# EAGLE board 5x5 (EAGLE 9.0.1), part 1 of 2
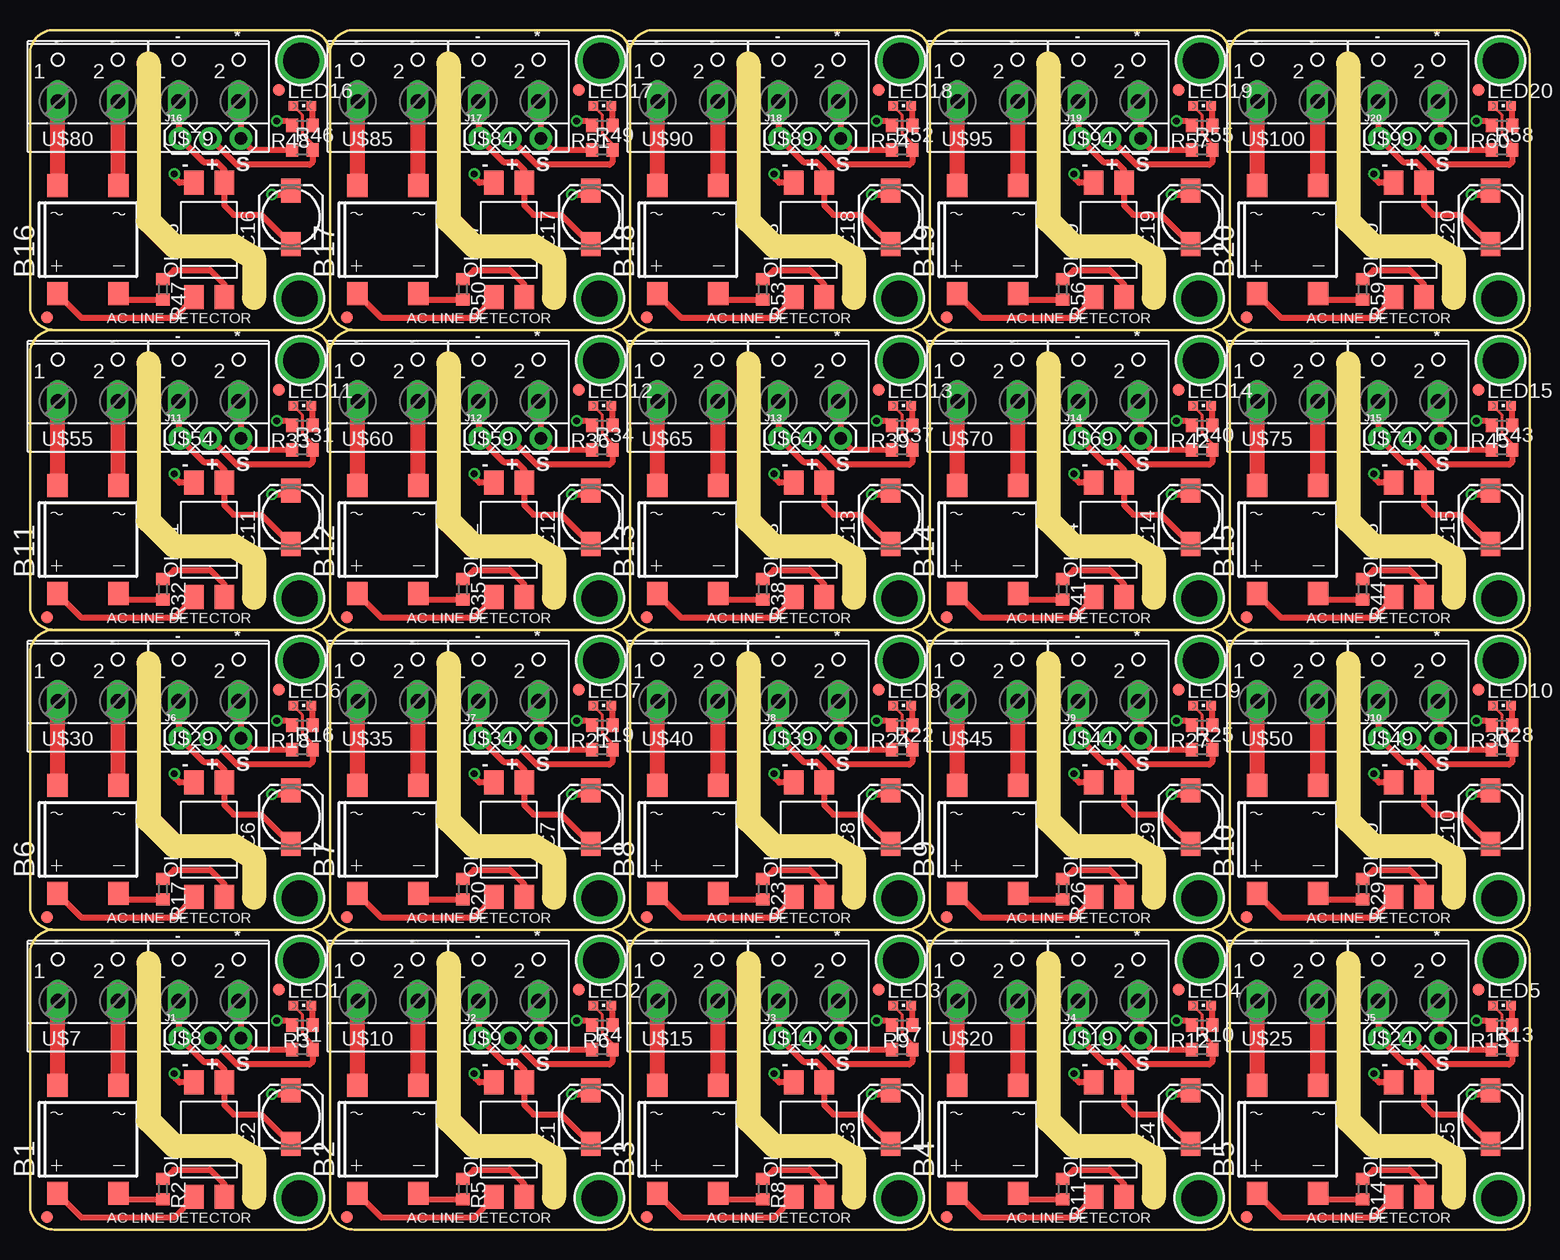
[diagram p0: board, top side]
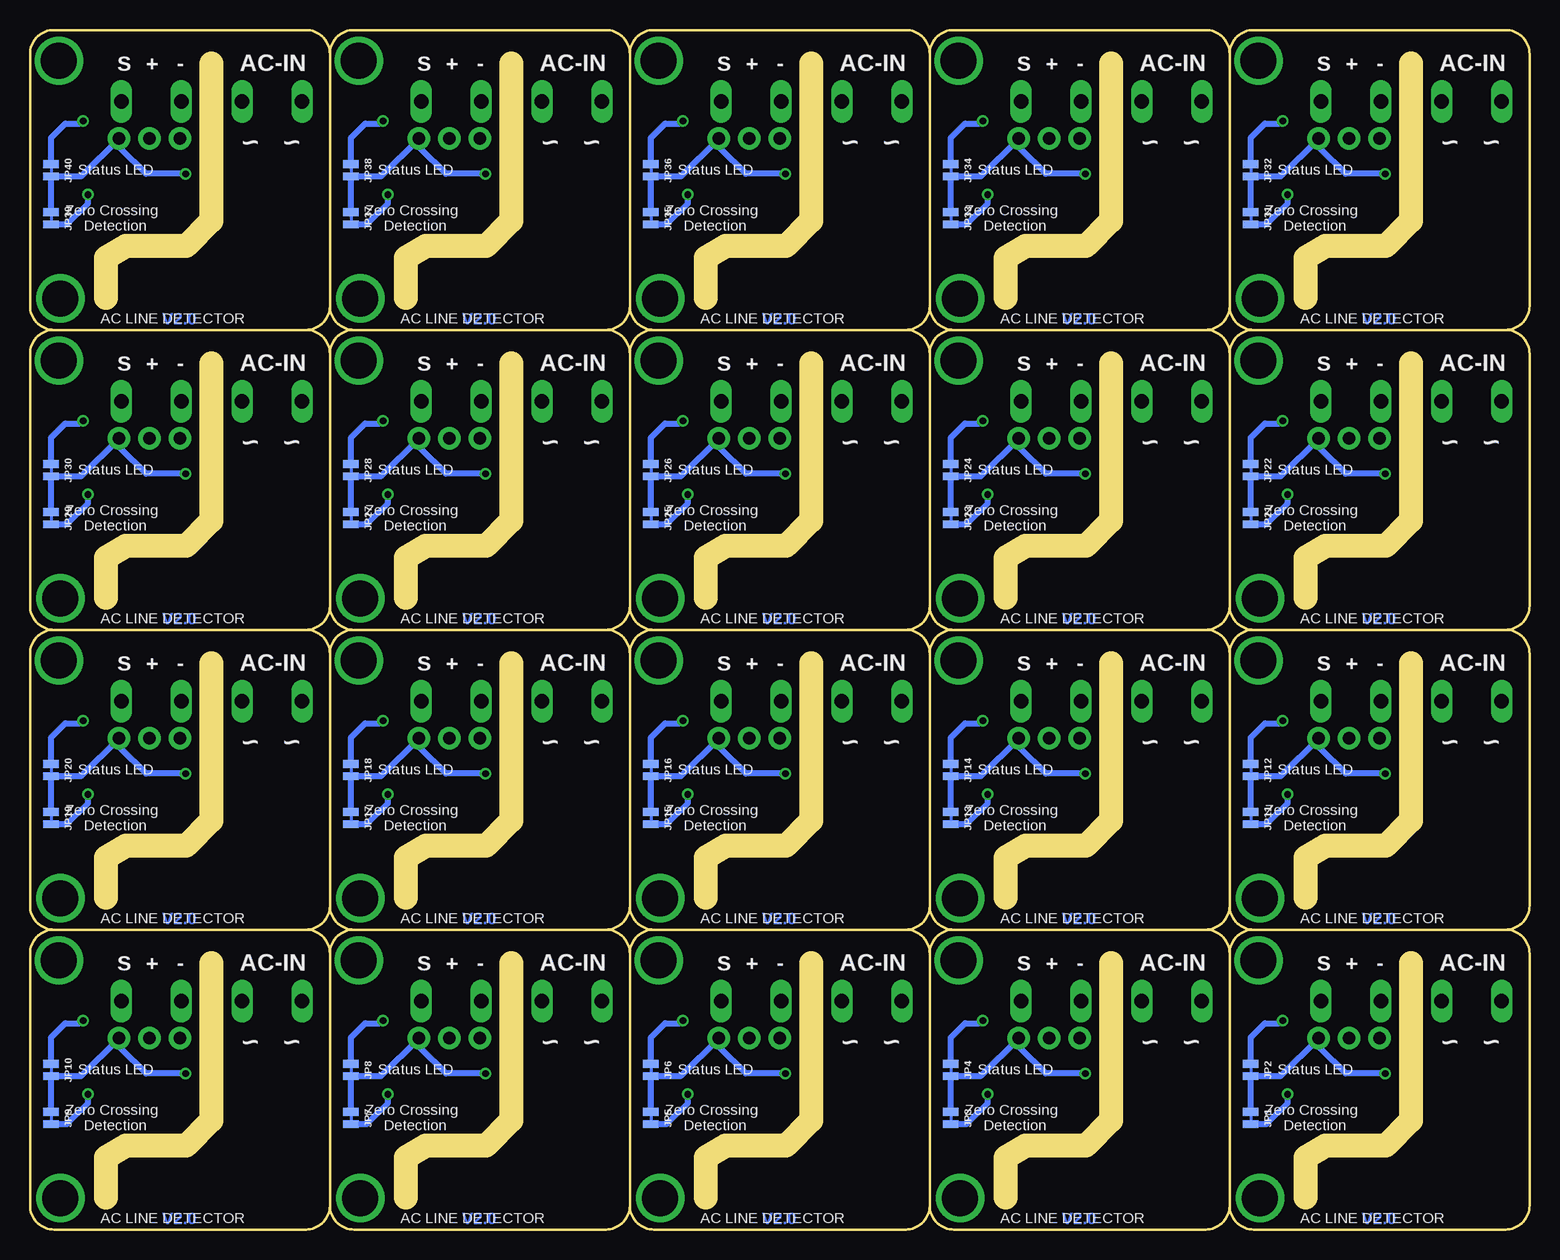
[diagram p1: board, bottom side, seen from below]

Size 125 x 100 mm. Coordinates in mm from the lower left corner, seen from the top.
Outline: 160 segments
Copper layers (1*16): Top 0.035mm / dielectric 1.5mm / Bottom 0.035mm
Design rules "default": minimum track width 6mil, minimum drill 0.35mm, track to track 6mil, track to pad 6mil, pad to pad 6mil, via to via 6mil, smd to smd 6mil, copper to edge 40mil, drill to drill 6mil, minimum pad ring 10mil, minimum via ring 8mil, stop-mask expansion 4mil, vias tented up to drill 0mil, thermal gap 10mil
Milling: 100 lines

## Footprints (pad centres in the part's own frame; a part is rotated, then mirrored left to right if it is on the bottom)
DBS = smd 1.7 x 1.9: + -2.55,-4.5; - 2.55,-4.5; AC1 -2.55,4.5; AC2 2.55,4.5
CAPACITOR-2.2UF_4X5MM_JENNY = smd 2 x 1.6: + 2.197,-0.004; - -2.289,0.004
FIDUCIAL_1MM = smd 1 x 1: 1 0,0
1X03 = drill 1.016 pad 1.88: 1 0,0; 2 2.54,0; 3 5.08,0
SMT-JUMPER_2_NC_TRACE_NO-SILK = smd 0.635 x 1.27: 1 -0.508,0; 2 0.508,0
CHIPLED_0603 = smd 0.8 x 0.8: A 0,-0.75; C 0,0.75
DIL4-SMD = smd 1.6 x 2: 1 -1.27,-4.77; 2 1.27,-4.77; 3 1.27,4.77; 4 -1.27,4.77
R0603 = smd 1 x 1.1: 1 -0.85,0; 2 0.85,0
MOUNTINGHOLE_3.0_PLATEDTHIN = drill 3 pad 3.6: P$1 0,0
W237-102 = drill 1.194 long: 1 -2.5,-1.27; 2 2.5,-1.27

## Placement (x,y rotation side)
B1  DBS107G  [DBS]  4.83,7.52 0 top
B2  DBS107G  [DBS]  29.83,7.52 0 top
B3  DBS107G  [DBS]  54.83,7.52 0 top
B4  DBS107G  [DBS]  79.83,7.52 0 top
B5  DBS107G  [DBS]  104.83,7.52 0 top
B6  DBS107G  [DBS]  4.83,32.52 0 top
B7  DBS107G  [DBS]  29.83,32.52 0 top
B8  DBS107G  [DBS]  54.83,32.52 0 top
B9  DBS107G  [DBS]  79.83,32.52 0 top
B10  DBS107G  [DBS]  104.83,32.52 0 top
B11  DBS107G  [DBS]  4.83,57.52 0 top
B12  DBS107G  [DBS]  29.83,57.52 0 top
B13  DBS107G  [DBS]  54.83,57.52 0 top
B14  DBS107G  [DBS]  79.83,57.52 0 top
B15  DBS107G  [DBS]  104.83,57.52 0 top
B16  DBS107G  [DBS]  4.83,82.52 0 top
B17  DBS107G  [DBS]  29.83,82.52 0 top
B18  DBS107G  [DBS]  54.83,82.52 0 top
B19  DBS107G  [DBS]  79.83,82.52 0 top
B20  DBS107G  [DBS]  104.83,82.52 0 top
C1  2.2uF  [CAPACITOR-2.2UF_4X5MM_JENNY]  46.75,9.42 90 top
C2  2.2uF  [CAPACITOR-2.2UF_4X5MM_JENNY]  21.75,9.42 90 top
C3  2.2uF  [CAPACITOR-2.2UF_4X5MM_JENNY]  71.75,9.42 90 top
C4  2.2uF  [CAPACITOR-2.2UF_4X5MM_JENNY]  96.75,9.42 90 top
C5  2.2uF  [CAPACITOR-2.2UF_4X5MM_JENNY]  121.75,9.42 90 top
C6  2.2uF  [CAPACITOR-2.2UF_4X5MM_JENNY]  21.75,34.42 90 top
C7  2.2uF  [CAPACITOR-2.2UF_4X5MM_JENNY]  46.75,34.42 90 top
C8  2.2uF  [CAPACITOR-2.2UF_4X5MM_JENNY]  71.75,34.42 90 top
C9  2.2uF  [CAPACITOR-2.2UF_4X5MM_JENNY]  96.75,34.42 90 top
C10  2.2uF  [CAPACITOR-2.2UF_4X5MM_JENNY]  121.75,34.42 90 top
C11  2.2uF  [CAPACITOR-2.2UF_4X5MM_JENNY]  21.75,59.42 90 top
C12  2.2uF  [CAPACITOR-2.2UF_4X5MM_JENNY]  46.75,59.42 90 top
C13  2.2uF  [CAPACITOR-2.2UF_4X5MM_JENNY]  71.75,59.42 90 top
C14  2.2uF  [CAPACITOR-2.2UF_4X5MM_JENNY]  96.75,59.42 90 top
C15  2.2uF  [CAPACITOR-2.2UF_4X5MM_JENNY]  121.75,59.42 90 top
C16  2.2uF  [CAPACITOR-2.2UF_4X5MM_JENNY]  21.75,84.42 90 top
C17  2.2uF  [CAPACITOR-2.2UF_4X5MM_JENNY]  46.75,84.42 90 top
C18  2.2uF  [CAPACITOR-2.2UF_4X5MM_JENNY]  71.75,84.42 90 top
C19  2.2uF  [CAPACITOR-2.2UF_4X5MM_JENNY]  96.75,84.42 90 top
C20  2.2uF  [CAPACITOR-2.2UF_4X5MM_JENNY]  121.75,84.42 90 top
FID1  FIDUCIAL""  [FIDUCIAL_1MM]  20.76,20 0 top
FID2  FIDUCIAL""  [FIDUCIAL_1MM]  1.41,1.05 0 top
FID3  FIDUCIAL""  [FIDUCIAL_1MM]  45.76,20 0 top
FID4  FIDUCIAL""  [FIDUCIAL_1MM]  26.41,1.05 0 top
FID5  FIDUCIAL""  [FIDUCIAL_1MM]  70.76,20 0 top
FID6  FIDUCIAL""  [FIDUCIAL_1MM]  51.41,1.05 0 top
FID7  FIDUCIAL""  [FIDUCIAL_1MM]  95.76,20 0 top
FID8  FIDUCIAL""  [FIDUCIAL_1MM]  76.41,1.05 0 top
FID9  FIDUCIAL""  [FIDUCIAL_1MM]  120.76,20 0 top
FID10  FIDUCIAL""  [FIDUCIAL_1MM]  101.41,1.05 0 top
FID11  FIDUCIAL""  [FIDUCIAL_1MM]  20.76,45 0 top
FID12  FIDUCIAL""  [FIDUCIAL_1MM]  1.41,26.05 0 top
FID13  FIDUCIAL""  [FIDUCIAL_1MM]  45.76,45 0 top
FID14  FIDUCIAL""  [FIDUCIAL_1MM]  26.41,26.05 0 top
FID15  FIDUCIAL""  [FIDUCIAL_1MM]  70.76,45 0 top
FID16  FIDUCIAL""  [FIDUCIAL_1MM]  51.41,26.05 0 top
FID17  FIDUCIAL""  [FIDUCIAL_1MM]  95.76,45 0 top
FID18  FIDUCIAL""  [FIDUCIAL_1MM]  76.41,26.05 0 top
FID19  FIDUCIAL""  [FIDUCIAL_1MM]  120.76,45 0 top
FID20  FIDUCIAL""  [FIDUCIAL_1MM]  101.41,26.05 0 top
FID21  FIDUCIAL""  [FIDUCIAL_1MM]  20.76,70 0 top
FID22  FIDUCIAL""  [FIDUCIAL_1MM]  1.41,51.05 0 top
FID23  FIDUCIAL""  [FIDUCIAL_1MM]  45.76,70 0 top
FID24  FIDUCIAL""  [FIDUCIAL_1MM]  26.41,51.05 0 top
FID25  FIDUCIAL""  [FIDUCIAL_1MM]  70.76,70 0 top
FID26  FIDUCIAL""  [FIDUCIAL_1MM]  51.41,51.05 0 top
FID27  FIDUCIAL""  [FIDUCIAL_1MM]  95.76,70 0 top
FID28  FIDUCIAL""  [FIDUCIAL_1MM]  76.41,51.05 0 top
FID29  FIDUCIAL""  [FIDUCIAL_1MM]  120.76,70 0 top
FID30  FIDUCIAL""  [FIDUCIAL_1MM]  101.41,51.05 0 top
FID31  FIDUCIAL""  [FIDUCIAL_1MM]  20.76,95 0 top
FID32  FIDUCIAL""  [FIDUCIAL_1MM]  1.41,76.05 0 top
FID33  FIDUCIAL""  [FIDUCIAL_1MM]  45.76,95 0 top
FID34  FIDUCIAL""  [FIDUCIAL_1MM]  26.41,76.05 0 top
FID35  FIDUCIAL""  [FIDUCIAL_1MM]  70.76,95 0 top
FID36  FIDUCIAL""  [FIDUCIAL_1MM]  51.41,76.05 0 top
FID37  FIDUCIAL""  [FIDUCIAL_1MM]  95.76,95 0 top
FID38  FIDUCIAL""  [FIDUCIAL_1MM]  76.41,76.05 0 top
FID39  FIDUCIAL""  [FIDUCIAL_1MM]  120.76,95 0 top
FID40  FIDUCIAL""  [FIDUCIAL_1MM]  101.41,76.05 0 top
J1  [1X03]  12.5,15.95 0 top
J2  [1X03]  37.5,15.95 0 top
J3  [1X03]  62.5,15.95 0 top
J4  [1X03]  87.5,15.95 0 top
J5  [1X03]  112.5,15.95 0 top
J6  [1X03]  12.5,40.95 0 top
J7  [1X03]  37.5,40.95 0 top
J8  [1X03]  62.5,40.95 0 top
J9  [1X03]  87.5,40.95 0 top
J10  [1X03]  112.5,40.95 0 top
J11  [1X03]  12.5,65.95 0 top
J12  [1X03]  37.5,65.95 0 top
J13  [1X03]  62.5,65.95 0 top
J14  [1X03]  87.5,65.95 0 top
J15  [1X03]  112.5,65.95 0 top
J16  [1X03]  12.5,90.95 0 top
J17  [1X03]  37.5,90.95 0 top
J18  [1X03]  62.5,90.95 0 top
J19  [1X03]  87.5,90.95 0 top
J20  [1X03]  112.5,90.95 0 top
JP1  JUMPER-SMT_2_NC_TRACE_NO-SILK  [SMT-JUMPER_2_NC_TRACE_NO-SILK]  23.25,9.3 270 bottom
JP2  JUMPER-SMT_2_NC_TRACE_NO-SILK  [SMT-JUMPER_2_NC_TRACE_NO-SILK]  23.25,13.3 270 bottom
JP3  JUMPER-SMT_2_NC_TRACE_NO-SILK  [SMT-JUMPER_2_NC_TRACE_NO-SILK]  48.25,9.3 270 bottom
JP4  JUMPER-SMT_2_NC_TRACE_NO-SILK  [SMT-JUMPER_2_NC_TRACE_NO-SILK]  48.25,13.3 270 bottom
JP5  JUMPER-SMT_2_NC_TRACE_NO-SILK  [SMT-JUMPER_2_NC_TRACE_NO-SILK]  73.25,9.3 270 bottom
JP6  JUMPER-SMT_2_NC_TRACE_NO-SILK  [SMT-JUMPER_2_NC_TRACE_NO-SILK]  73.25,13.3 270 bottom
JP7  JUMPER-SMT_2_NC_TRACE_NO-SILK  [SMT-JUMPER_2_NC_TRACE_NO-SILK]  98.25,9.3 270 bottom
JP8  JUMPER-SMT_2_NC_TRACE_NO-SILK  [SMT-JUMPER_2_NC_TRACE_NO-SILK]  98.25,13.3 270 bottom
JP9  JUMPER-SMT_2_NC_TRACE_NO-SILK  [SMT-JUMPER_2_NC_TRACE_NO-SILK]  123.25,9.3 270 bottom
JP10  JUMPER-SMT_2_NC_TRACE_NO-SILK  [SMT-JUMPER_2_NC_TRACE_NO-SILK]  123.25,13.3 270 bottom
JP11  JUMPER-SMT_2_NC_TRACE_NO-SILK  [SMT-JUMPER_2_NC_TRACE_NO-SILK]  23.25,34.3 270 bottom
JP12  JUMPER-SMT_2_NC_TRACE_NO-SILK  [SMT-JUMPER_2_NC_TRACE_NO-SILK]  23.25,38.3 270 bottom
JP13  JUMPER-SMT_2_NC_TRACE_NO-SILK  [SMT-JUMPER_2_NC_TRACE_NO-SILK]  48.25,34.3 270 bottom
JP14  JUMPER-SMT_2_NC_TRACE_NO-SILK  [SMT-JUMPER_2_NC_TRACE_NO-SILK]  48.25,38.3 270 bottom
JP15  JUMPER-SMT_2_NC_TRACE_NO-SILK  [SMT-JUMPER_2_NC_TRACE_NO-SILK]  73.25,34.3 270 bottom
JP16  JUMPER-SMT_2_NC_TRACE_NO-SILK  [SMT-JUMPER_2_NC_TRACE_NO-SILK]  73.25,38.3 270 bottom
JP17  JUMPER-SMT_2_NC_TRACE_NO-SILK  [SMT-JUMPER_2_NC_TRACE_NO-SILK]  98.25,34.3 270 bottom
JP18  JUMPER-SMT_2_NC_TRACE_NO-SILK  [SMT-JUMPER_2_NC_TRACE_NO-SILK]  98.25,38.3 270 bottom
JP19  JUMPER-SMT_2_NC_TRACE_NO-SILK  [SMT-JUMPER_2_NC_TRACE_NO-SILK]  123.25,34.3 270 bottom
JP20  JUMPER-SMT_2_NC_TRACE_NO-SILK  [SMT-JUMPER_2_NC_TRACE_NO-SILK]  123.25,38.3 270 bottom
JP21  JUMPER-SMT_2_NC_TRACE_NO-SILK  [SMT-JUMPER_2_NC_TRACE_NO-SILK]  23.25,59.3 270 bottom
JP22  JUMPER-SMT_2_NC_TRACE_NO-SILK  [SMT-JUMPER_2_NC_TRACE_NO-SILK]  23.25,63.3 270 bottom
JP23  JUMPER-SMT_2_NC_TRACE_NO-SILK  [SMT-JUMPER_2_NC_TRACE_NO-SILK]  48.25,59.3 270 bottom
JP24  JUMPER-SMT_2_NC_TRACE_NO-SILK  [SMT-JUMPER_2_NC_TRACE_NO-SILK]  48.25,63.3 270 bottom
JP25  JUMPER-SMT_2_NC_TRACE_NO-SILK  [SMT-JUMPER_2_NC_TRACE_NO-SILK]  73.25,59.3 270 bottom
JP26  JUMPER-SMT_2_NC_TRACE_NO-SILK  [SMT-JUMPER_2_NC_TRACE_NO-SILK]  73.25,63.3 270 bottom
JP27  JUMPER-SMT_2_NC_TRACE_NO-SILK  [SMT-JUMPER_2_NC_TRACE_NO-SILK]  98.25,59.3 270 bottom
JP28  JUMPER-SMT_2_NC_TRACE_NO-SILK  [SMT-JUMPER_2_NC_TRACE_NO-SILK]  98.25,63.3 270 bottom
JP29  JUMPER-SMT_2_NC_TRACE_NO-SILK  [SMT-JUMPER_2_NC_TRACE_NO-SILK]  123.25,59.3 270 bottom
JP30  JUMPER-SMT_2_NC_TRACE_NO-SILK  [SMT-JUMPER_2_NC_TRACE_NO-SILK]  123.25,63.3 270 bottom
JP31  JUMPER-SMT_2_NC_TRACE_NO-SILK  [SMT-JUMPER_2_NC_TRACE_NO-SILK]  23.25,84.3 270 bottom
JP32  JUMPER-SMT_2_NC_TRACE_NO-SILK  [SMT-JUMPER_2_NC_TRACE_NO-SILK]  23.25,88.3 270 bottom
JP33  JUMPER-SMT_2_NC_TRACE_NO-SILK  [SMT-JUMPER_2_NC_TRACE_NO-SILK]  48.25,84.3 270 bottom
JP34  JUMPER-SMT_2_NC_TRACE_NO-SILK  [SMT-JUMPER_2_NC_TRACE_NO-SILK]  48.25,88.3 270 bottom
JP35  JUMPER-SMT_2_NC_TRACE_NO-SILK  [SMT-JUMPER_2_NC_TRACE_NO-SILK]  73.25,84.3 270 bottom
JP36  JUMPER-SMT_2_NC_TRACE_NO-SILK  [SMT-JUMPER_2_NC_TRACE_NO-SILK]  73.25,88.3 270 bottom
JP37  JUMPER-SMT_2_NC_TRACE_NO-SILK  [SMT-JUMPER_2_NC_TRACE_NO-SILK]  98.25,84.3 270 bottom
JP38  JUMPER-SMT_2_NC_TRACE_NO-SILK  [SMT-JUMPER_2_NC_TRACE_NO-SILK]  98.25,88.3 270 bottom
JP39  JUMPER-SMT_2_NC_TRACE_NO-SILK  [SMT-JUMPER_2_NC_TRACE_NO-SILK]  123.25,84.3 270 bottom
JP40  JUMPER-SMT_2_NC_TRACE_NO-SILK  [SMT-JUMPER_2_NC_TRACE_NO-SILK]  123.25,88.3 270 bottom
LED1  [CHIPLED_0603]  22.7,18.68 270 top
LED2  [CHIPLED_0603]  47.7,18.68 270 top
LED3  [CHIPLED_0603]  72.7,18.68 270 top
LED4  [CHIPLED_0603]  97.7,18.68 270 top
LED5  [CHIPLED_0603]  122.7,18.68 270 top
LED6  [CHIPLED_0603]  22.7,43.68 270 top
LED7  [CHIPLED_0603]  47.7,43.68 270 top
LED8  [CHIPLED_0603]  72.7,43.68 270 top
LED9  [CHIPLED_0603]  97.7,43.68 270 top
LED10  [CHIPLED_0603]  122.7,43.68 270 top
LED11  [CHIPLED_0603]  22.7,68.68 270 top
LED12  [CHIPLED_0603]  47.7,68.68 270 top
LED13  [CHIPLED_0603]  72.7,68.68 270 top
LED14  [CHIPLED_0603]  97.7,68.68 270 top
LED15  [CHIPLED_0603]  122.7,68.68 270 top
LED16  [CHIPLED_0603]  22.7,93.68 270 top
LED17  [CHIPLED_0603]  47.7,93.68 270 top
LED18  [CHIPLED_0603]  72.7,93.68 270 top
LED19  [CHIPLED_0603]  97.7,93.68 270 top
LED20  [CHIPLED_0603]  122.7,93.68 270 top
LOGO1  OSHW-LOGOMINI  [OSHW-LOGO-MINI]  4.83,8.74 0 bottom
LOGO2  OSHW-LOGOMINI  [OSHW-LOGO-MINI]  29.83,8.74 0 bottom
LOGO3  OSHW-LOGOMINI  [OSHW-LOGO-MINI]  54.83,8.74 0 bottom
LOGO4  OSHW-LOGOMINI  [OSHW-LOGO-MINI]  79.83,8.74 0 bottom
LOGO5  OSHW-LOGOMINI  [OSHW-LOGO-MINI]  104.83,8.74 0 bottom
LOGO6  OSHW-LOGOMINI  [OSHW-LOGO-MINI]  4.83,33.74 0 bottom
LOGO7  OSHW-LOGOMINI  [OSHW-LOGO-MINI]  29.83,33.74 0 bottom
LOGO8  OSHW-LOGOMINI  [OSHW-LOGO-MINI]  54.83,33.74 0 bottom
LOGO9  OSHW-LOGOMINI  [OSHW-LOGO-MINI]  79.83,33.74 0 bottom
LOGO10  OSHW-LOGOMINI  [OSHW-LOGO-MINI]  104.83,33.74 0 bottom
LOGO11  OSHW-LOGOMINI  [OSHW-LOGO-MINI]  4.83,58.74 0 bottom
LOGO12  OSHW-LOGOMINI  [OSHW-LOGO-MINI]  29.83,58.74 0 bottom
LOGO13  OSHW-LOGOMINI  [OSHW-LOGO-MINI]  54.83,58.74 0 bottom
LOGO14  OSHW-LOGOMINI  [OSHW-LOGO-MINI]  79.83,58.74 0 bottom
LOGO15  OSHW-LOGOMINI  [OSHW-LOGO-MINI]  104.83,58.74 0 bottom
LOGO16  OSHW-LOGOMINI  [OSHW-LOGO-MINI]  4.83,83.74 0 bottom
LOGO17  OSHW-LOGOMINI  [OSHW-LOGO-MINI]  29.83,83.74 0 bottom
LOGO18  OSHW-LOGOMINI  [OSHW-LOGO-MINI]  54.83,83.74 0 bottom
LOGO19  OSHW-LOGOMINI  [OSHW-LOGO-MINI]  79.83,83.74 0 bottom
LOGO20  OSHW-LOGOMINI  [OSHW-LOGO-MINI]  104.83,83.74 0 bottom
OK1  LTV816S  [DIL4-SMD]  14.93,7.5 0 top
OK2  LTV816S  [DIL4-SMD]  39.93,7.5 0 top
OK3  LTV816S  [DIL4-SMD]  64.93,7.5 0 top
OK4  LTV816S  [DIL4-SMD]  89.93,7.5 0 top
OK5  LTV816S  [DIL4-SMD]  114.93,7.5 0 top
OK6  LTV816S  [DIL4-SMD]  14.93,32.5 0 top
OK7  LTV816S  [DIL4-SMD]  39.93,32.5 0 top
OK8  LTV816S  [DIL4-SMD]  64.93,32.5 0 top
OK9  LTV816S  [DIL4-SMD]  89.93,32.5 0 top
OK10  LTV816S  [DIL4-SMD]  114.93,32.5 0 top
OK11  LTV816S  [DIL4-SMD]  14.93,57.5 0 top
OK12  LTV816S  [DIL4-SMD]  39.93,57.5 0 top
OK13  LTV816S  [DIL4-SMD]  64.93,57.5 0 top
OK14  LTV816S  [DIL4-SMD]  89.93,57.5 0 top
OK15  LTV816S  [DIL4-SMD]  114.93,57.5 0 top
OK16  LTV816S  [DIL4-SMD]  14.93,82.5 0 top
OK17  LTV816S  [DIL4-SMD]  39.93,82.5 0 top
OK18  LTV816S  [DIL4-SMD]  64.93,82.5 0 top
OK19  LTV816S  [DIL4-SMD]  89.93,82.5 0 top
OK20  LTV816S  [DIL4-SMD]  114.93,82.5 0 top
R1  10k  [R0603]  22.7,15 0 top
R2  390k  [R0603]  11.08,3.38 270 top
R3  100R/330R  [R0603]  22.7,17.05 180 top
R4  10k  [R0603]  47.7,15 0 top
R5  390k  [R0603]  36.08,3.38 270 top
R6  100R/330R  [R0603]  47.7,17.05 180 top
R7  10k  [R0603]  72.7,15 0 top
R8  390k  [R0603]  61.08,3.38 270 top
R9  100R/330R  [R0603]  72.7,17.05 180 top
R10  10k  [R0603]  97.7,15 0 top
R11  390k  [R0603]  86.08,3.38 270 top
R12  100R/330R  [R0603]  97.7,17.05 180 top
R13  10k  [R0603]  122.7,15 0 top
R14  390k  [R0603]  111.08,3.38 270 top
R15  100R/330R  [R0603]  122.7,17.05 180 top
R16  10k  [R0603]  22.7,40 0 top
R17  390k  [R0603]  11.08,28.38 270 top
R18  100R/330R  [R0603]  22.7,42.05 180 top
R19  10k  [R0603]  47.7,40 0 top
R20  390k  [R0603]  36.08,28.38 270 top
R21  100R/330R  [R0603]  47.7,42.05 180 top
R22  10k  [R0603]  72.7,40 0 top
R23  390k  [R0603]  61.08,28.38 270 top
R24  100R/330R  [R0603]  72.7,42.05 180 top
R25  10k  [R0603]  97.7,40 0 top
R26  390k  [R0603]  86.08,28.38 270 top
R27  100R/330R  [R0603]  97.7,42.05 180 top
R28  10k  [R0603]  122.7,40 0 top
R29  390k  [R0603]  111.08,28.38 270 top
R30  100R/330R  [R0603]  122.7,42.05 180 top
R31  10k  [R0603]  22.7,65 0 top
R32  390k  [R0603]  11.08,53.38 270 top
R33  100R/330R  [R0603]  22.7,67.05 180 top
R34  10k  [R0603]  47.7,65 0 top
R35  390k  [R0603]  36.08,53.38 270 top
R36  100R/330R  [R0603]  47.7,67.05 180 top
R37  10k  [R0603]  72.7,65 0 top
R38  390k  [R0603]  61.08,53.38 270 top
R39  100R/330R  [R0603]  72.7,67.05 180 top
R40  10k  [R0603]  97.7,65 0 top
R41  390k  [R0603]  86.08,53.38 270 top
R42  100R/330R  [R0603]  97.7,67.05 180 top
R43  10k  [R0603]  122.7,65 0 top
R44  390k  [R0603]  111.08,53.38 270 top
R45  100R/330R  [R0603]  122.7,67.05 180 top
R46  10k  [R0603]  22.7,90 0 top
R47  390k  [R0603]  11.08,78.38 270 top
R48  100R/330R  [R0603]  22.7,92.05 180 top
R49  10k  [R0603]  47.7,90 0 top
R50  390k  [R0603]  36.08,78.38 270 top
R51  100R/330R  [R0603]  47.7,92.05 180 top
R52  10k  [R0603]  72.7,90 0 top
R53  390k  [R0603]  61.08,78.38 270 top
R54  100R/330R  [R0603]  72.7,92.05 180 top
R55  10k  [R0603]  97.7,90 0 top
R56  390k  [R0603]  86.08,78.38 270 top
R57  100R/330R  [R0603]  97.7,92.05 180 top
R58  10k  [R0603]  122.7,90 0 top
R59  390k  [R0603]  111.08,78.38 270 top
R60  100R/330R  [R0603]  122.7,92.05 180 top
U$1  LOGO-9.5MMX4.5MM  [LOGO-9.5MMX4.5MM]  17.23,2.21 0 bottom
U$2  LOGO-9.5MMX4.5MM  [LOGO-9.5MMX4.5MM]  42.23,2.21 0 bottom
U$3  MOUNTINGHOLE3.0THIN  [MOUNTINGHOLE_3.0_PLATEDTHIN]  47.46,2.62 0 top
U$4  MOUNTINGHOLE3.0THIN  [MOUNTINGHOLE_3.0_PLATEDTHIN]  47.59,22.44 0 top
U$5  MOUNTINGHOLE3.0THIN  [MOUNTINGHOLE_3.0_PLATEDTHIN]  22.46,2.62 0 top
U$6  MOUNTINGHOLE3.0THIN  [MOUNTINGHOLE_3.0_PLATEDTHIN]  22.59,22.44 0 top
U$7  SCREW_TERMINALS-2P-5MM  [W237-102]  4.82,20.31 0 top
U$8  SCREW_TERMINALS-2P-5MM  [W237-102]  14.89,20.32 0 top
U$9  SCREW_TERMINALS-2P-5MM  [W237-102]  39.89,20.32 0 top
U$10  SCREW_TERMINALS-2P-5MM  [W237-102]  29.82,20.31 0 top
U$11  LOGO-9.5MMX4.5MM  [LOGO-9.5MMX4.5MM]  67.23,2.21 0 bottom
U$12  MOUNTINGHOLE3.0THIN  [MOUNTINGHOLE_3.0_PLATEDTHIN]  72.46,2.62 0 top
U$13  MOUNTINGHOLE3.0THIN  [MOUNTINGHOLE_3.0_PLATEDTHIN]  72.59,22.44 0 top
U$14  SCREW_TERMINALS-2P-5MM  [W237-102]  64.89,20.32 0 top
U$15  SCREW_TERMINALS-2P-5MM  [W237-102]  54.82,20.31 0 top
U$16  LOGO-9.5MMX4.5MM  [LOGO-9.5MMX4.5MM]  92.23,2.21 0 bottom
U$17  MOUNTINGHOLE3.0THIN  [MOUNTINGHOLE_3.0_PLATEDTHIN]  97.46,2.62 0 top
U$18  MOUNTINGHOLE3.0THIN  [MOUNTINGHOLE_3.0_PLATEDTHIN]  97.59,22.44 0 top
U$19  SCREW_TERMINALS-2P-5MM  [W237-102]  89.89,20.32 0 top
U$20  SCREW_TERMINALS-2P-5MM  [W237-102]  79.82,20.31 0 top
U$21  LOGO-9.5MMX4.5MM  [LOGO-9.5MMX4.5MM]  117.23,2.21 0 bottom
U$22  MOUNTINGHOLE3.0THIN  [MOUNTINGHOLE_3.0_PLATEDTHIN]  122.46,2.62 0 top
U$23  MOUNTINGHOLE3.0THIN  [MOUNTINGHOLE_3.0_PLATEDTHIN]  122.59,22.44 0 top
U$24  SCREW_TERMINALS-2P-5MM  [W237-102]  114.89,20.32 0 top
U$25  SCREW_TERMINALS-2P-5MM  [W237-102]  104.82,20.31 0 top
U$26  LOGO-9.5MMX4.5MM  [LOGO-9.5MMX4.5MM]  17.23,27.21 0 bottom
U$27  MOUNTINGHOLE3.0THIN  [MOUNTINGHOLE_3.0_PLATEDTHIN]  22.46,27.62 0 top
U$28  MOUNTINGHOLE3.0THIN  [MOUNTINGHOLE_3.0_PLATEDTHIN]  22.59,47.44 0 top
U$29  SCREW_TERMINALS-2P-5MM  [W237-102]  14.89,45.32 0 top
U$30  SCREW_TERMINALS-2P-5MM  [W237-102]  4.82,45.31 0 top
U$31  LOGO-9.5MMX4.5MM  [LOGO-9.5MMX4.5MM]  42.23,27.21 0 bottom
U$32  MOUNTINGHOLE3.0THIN  [MOUNTINGHOLE_3.0_PLATEDTHIN]  47.46,27.62 0 top
U$33  MOUNTINGHOLE3.0THIN  [MOUNTINGHOLE_3.0_PLATEDTHIN]  47.59,47.44 0 top
U$34  SCREW_TERMINALS-2P-5MM  [W237-102]  39.89,45.32 0 top
U$35  SCREW_TERMINALS-2P-5MM  [W237-102]  29.82,45.31 0 top
U$36  LOGO-9.5MMX4.5MM  [LOGO-9.5MMX4.5MM]  67.23,27.21 0 bottom
U$37  MOUNTINGHOLE3.0THIN  [MOUNTINGHOLE_3.0_PLATEDTHIN]  72.46,27.62 0 top
U$38  MOUNTINGHOLE3.0THIN  [MOUNTINGHOLE_3.0_PLATEDTHIN]  72.59,47.44 0 top
U$39  SCREW_TERMINALS-2P-5MM  [W237-102]  64.89,45.32 0 top
U$40  SCREW_TERMINALS-2P-5MM  [W237-102]  54.82,45.31 0 top
U$41  LOGO-9.5MMX4.5MM  [LOGO-9.5MMX4.5MM]  92.23,27.21 0 bottom
U$42  MOUNTINGHOLE3.0THIN  [MOUNTINGHOLE_3.0_PLATEDTHIN]  97.46,27.62 0 top
U$43  MOUNTINGHOLE3.0THIN  [MOUNTINGHOLE_3.0_PLATEDTHIN]  97.59,47.44 0 top
U$44  SCREW_TERMINALS-2P-5MM  [W237-102]  89.89,45.32 0 top
U$45  SCREW_TERMINALS-2P-5MM  [W237-102]  79.82,45.31 0 top
U$46  LOGO-9.5MMX4.5MM  [LOGO-9.5MMX4.5MM]  117.23,27.21 0 bottom
U$47  MOUNTINGHOLE3.0THIN  [MOUNTINGHOLE_3.0_PLATEDTHIN]  122.46,27.62 0 top
U$48  MOUNTINGHOLE3.0THIN  [MOUNTINGHOLE_3.0_PLATEDTHIN]  122.59,47.44 0 top
U$49  SCREW_TERMINALS-2P-5MM  [W237-102]  114.89,45.32 0 top
U$50  SCREW_TERMINALS-2P-5MM  [W237-102]  104.82,45.31 0 top
U$51  LOGO-9.5MMX4.5MM  [LOGO-9.5MMX4.5MM]  17.23,52.21 0 bottom
U$52  MOUNTINGHOLE3.0THIN  [MOUNTINGHOLE_3.0_PLATEDTHIN]  22.46,52.62 0 top
U$53  MOUNTINGHOLE3.0THIN  [MOUNTINGHOLE_3.0_PLATEDTHIN]  22.59,72.44 0 top
U$54  SCREW_TERMINALS-2P-5MM  [W237-102]  14.89,70.32 0 top
U$55  SCREW_TERMINALS-2P-5MM  [W237-102]  4.82,70.31 0 top
U$56  LOGO-9.5MMX4.5MM  [LOGO-9.5MMX4.5MM]  42.23,52.21 0 bottom
U$57  MOUNTINGHOLE3.0THIN  [MOUNTINGHOLE_3.0_PLATEDTHIN]  47.46,52.62 0 top
U$58  MOUNTINGHOLE3.0THIN  [MOUNTINGHOLE_3.0_PLATEDTHIN]  47.59,72.44 0 top
U$59  SCREW_TERMINALS-2P-5MM  [W237-102]  39.89,70.32 0 top
U$60  SCREW_TERMINALS-2P-5MM  [W237-102]  29.82,70.31 0 top
U$61  LOGO-9.5MMX4.5MM  [LOGO-9.5MMX4.5MM]  67.23,52.21 0 bottom
U$62  MOUNTINGHOLE3.0THIN  [MOUNTINGHOLE_3.0_PLATEDTHIN]  72.46,52.62 0 top
U$63  MOUNTINGHOLE3.0THIN  [MOUNTINGHOLE_3.0_PLATEDTHIN]  72.59,72.44 0 top
U$64  SCREW_TERMINALS-2P-5MM  [W237-102]  64.89,70.32 0 top
U$65  SCREW_TERMINALS-2P-5MM  [W237-102]  54.82,70.31 0 top
U$66  LOGO-9.5MMX4.5MM  [LOGO-9.5MMX4.5MM]  92.23,52.21 0 bottom
U$67  MOUNTINGHOLE3.0THIN  [MOUNTINGHOLE_3.0_PLATEDTHIN]  97.46,52.62 0 top
U$68  MOUNTINGHOLE3.0THIN  [MOUNTINGHOLE_3.0_PLATEDTHIN]  97.59,72.44 0 top
U$69  SCREW_TERMINALS-2P-5MM  [W237-102]  89.89,70.32 0 top
U$70  SCREW_TERMINALS-2P-5MM  [W237-102]  79.82,70.31 0 top
U$71  LOGO-9.5MMX4.5MM  [LOGO-9.5MMX4.5MM]  117.23,52.21 0 bottom
U$72  MOUNTINGHOLE3.0THIN  [MOUNTINGHOLE_3.0_PLATEDTHIN]  122.46,52.62 0 top
U$73  MOUNTINGHOLE3.0THIN  [MOUNTINGHOLE_3.0_PLATEDTHIN]  122.59,72.44 0 top
U$74  SCREW_TERMINALS-2P-5MM  [W237-102]  114.89,70.32 0 top
U$75  SCREW_TERMINALS-2P-5MM  [W237-102]  104.82,70.31 0 top
U$76  LOGO-9.5MMX4.5MM  [LOGO-9.5MMX4.5MM]  17.23,77.21 0 bottom
U$77  MOUNTINGHOLE3.0THIN  [MOUNTINGHOLE_3.0_PLATEDTHIN]  22.46,77.62 0 top
U$78  MOUNTINGHOLE3.0THIN  [MOUNTINGHOLE_3.0_PLATEDTHIN]  22.59,97.44 0 top
U$79  SCREW_TERMINALS-2P-5MM  [W237-102]  14.89,95.32 0 top
U$80  SCREW_TERMINALS-2P-5MM  [W237-102]  4.82,95.31 0 top
U$81  LOGO-9.5MMX4.5MM  [LOGO-9.5MMX4.5MM]  42.23,77.21 0 bottom
U$82  MOUNTINGHOLE3.0THIN  [MOUNTINGHOLE_3.0_PLATEDTHIN]  47.46,77.62 0 top
U$83  MOUNTINGHOLE3.0THIN  [MOUNTINGHOLE_3.0_PLATEDTHIN]  47.59,97.44 0 top
U$84  SCREW_TERMINALS-2P-5MM  [W237-102]  39.89,95.32 0 top
U$85  SCREW_TERMINALS-2P-5MM  [W237-102]  29.82,95.31 0 top
U$86  LOGO-9.5MMX4.5MM  [LOGO-9.5MMX4.5MM]  67.23,77.21 0 bottom
U$87  MOUNTINGHOLE3.0THIN  [MOUNTINGHOLE_3.0_PLATEDTHIN]  72.46,77.62 0 top
U$88  MOUNTINGHOLE3.0THIN  [MOUNTINGHOLE_3.0_PLATEDTHIN]  72.59,97.44 0 top
U$89  SCREW_TERMINALS-2P-5MM  [W237-102]  64.89,95.32 0 top
U$90  SCREW_TERMINALS-2P-5MM  [W237-102]  54.82,95.31 0 top
U$91  LOGO-9.5MMX4.5MM  [LOGO-9.5MMX4.5MM]  92.23,77.21 0 bottom
U$92  MOUNTINGHOLE3.0THIN  [MOUNTINGHOLE_3.0_PLATEDTHIN]  97.46,77.62 0 top
U$93  MOUNTINGHOLE3.0THIN  [MOUNTINGHOLE_3.0_PLATEDTHIN]  97.59,97.44 0 top
U$94  SCREW_TERMINALS-2P-5MM  [W237-102]  89.89,95.32 0 top
U$95  SCREW_TERMINALS-2P-5MM  [W237-102]  79.82,95.31 0 top
U$96  LOGO-9.5MMX4.5MM  [LOGO-9.5MMX4.5MM]  117.23,77.21 0 bottom
U$97  MOUNTINGHOLE3.0THIN  [MOUNTINGHOLE_3.0_PLATEDTHIN]  122.46,77.62 0 top
U$98  MOUNTINGHOLE3.0THIN  [MOUNTINGHOLE_3.0_PLATEDTHIN]  122.59,97.44 0 top
U$99  SCREW_TERMINALS-2P-5MM  [W237-102]  114.89,95.32 0 top
U$100  SCREW_TERMINALS-2P-5MM  [W237-102]  104.82,95.31 0 top

## Library data of the parts
B1-B20 = rectifier
C1-C20 FID1-FID40 J1-J20 JP1-JP40 LED1-LED20 LOGO1-LOGO20 R1-R60 U$1-U$100 = edwinRobotics
OK1-OK20 = optocoupler

## Nets
5V: J1.2 LED1.A R1.2
5V1: J2.2 LED2.A R4.2
5V2: J3.2 LED3.A R7.2
5V3: J4.2 LED4.A R10.2
5V4: J5.2 LED5.A R13.2
5V5: J6.2 LED6.A R16.2
5V6: J7.2 LED7.A R19.2
5V7: J8.2 LED8.A R22.2
5V8: J9.2 LED9.A R25.2
5V9: J10.2 LED10.A R28.2
5V10: J11.2 LED11.A R31.2
5V11: J12.2 LED12.A R34.2
5V12: J13.2 LED13.A R37.2
5V13: J14.2 LED14.A R40.2
5V14: J15.2 LED15.A R43.2
5V15: J16.2 LED16.A R46.2
5V16: J17.2 LED17.A R49.2
5V17: J18.2 LED18.A R52.2
5V18: J19.2 LED19.A R55.2
5V19: J20.2 LED20.A R58.2
+: B1.+ OK1.1
+1: B2.+ OK2.1
+2: B3.+ OK3.1
+3: B4.+ OK4.1
+4: B5.+ OK5.1
+5: B6.+ OK6.1
+6: B7.+ OK7.1
+7: B8.+ OK8.1
+8: B9.+ OK9.1
+9: B10.+ OK10.1
+10: B11.+ OK11.1
+11: B12.+ OK12.1
+12: B13.+ OK13.1
+13: B14.+ OK14.1
+14: B15.+ OK15.1
+15: B16.+ OK16.1
+16: B17.+ OK17.1
+17: B18.+ OK18.1
+18: B19.+ OK19.1
+19: B20.+ OK20.1
-: OK1.2 R2.1
-1: OK2.2 R5.1
-2: OK3.2 R8.1
-3: OK4.2 R11.1
-4: OK5.2 R14.1
-5: OK6.2 R17.1
-6: OK7.2 R20.1
-7: OK8.2 R23.1
-8: OK9.2 R26.1
-9: OK10.2 R29.1
-10: OK11.2 R32.1
-11: OK12.2 R35.1
-12: OK13.2 R38.1
-13: OK14.2 R41.1
-14: OK15.2 R44.1
-15: OK16.2 R47.1
-16: OK17.2 R50.1
-17: OK18.2 R53.1
-18: OK19.2 R56.1
-19: OK20.2 R59.1
AC_L: B1.AC2 U$7.2
AC_L1: B2.AC2 U$10.2
AC_L2: B3.AC2 U$15.2
AC_L3: B4.AC2 U$20.2
AC_L4: B5.AC2 U$25.2
AC_L5: B6.AC2 U$30.2
AC_L6: B7.AC2 U$35.2
AC_L7: B8.AC2 U$40.2
AC_L8: B9.AC2 U$45.2
AC_L9: B10.AC2 U$50.2
AC_L10: B11.AC2 U$55.2
AC_L11: B12.AC2 U$60.2
AC_L12: B13.AC2 U$65.2
AC_L13: B14.AC2 U$70.2
AC_L14: B15.AC2 U$75.2
AC_L15: B16.AC2 U$80.2
AC_L16: B17.AC2 U$85.2
AC_L17: B18.AC2 U$90.2
AC_L18: B19.AC2 U$95.2
AC_L19: B20.AC2 U$100.2
AC_N: B1.AC1 U$7.1
AC_N1: B2.AC1 U$10.1
AC_N2: B3.AC1 U$15.1
AC_N3: B4.AC1 U$20.1
AC_N4: B5.AC1 U$25.1
AC_N5: B6.AC1 U$30.1
AC_N6: B7.AC1 U$35.1
AC_N7: B8.AC1 U$40.1
AC_N8: B9.AC1 U$45.1
AC_N9: B10.AC1 U$50.1
AC_N10: B11.AC1 U$55.1
AC_N11: B12.AC1 U$60.1
AC_N12: B13.AC1 U$65.1
AC_N13: B14.AC1 U$70.1
AC_N14: B15.AC1 U$75.1
AC_N15: B16.AC1 U$80.1
AC_N16: B17.AC1 U$85.1
AC_N17: B18.AC1 U$90.1
AC_N18: B19.AC1 U$95.1
AC_N19: B20.AC1 U$100.1
GND: C2.- J1.1 OK1.3 U$8.1
GND1: C1.- J2.1 OK2.3 U$9.1
GND2: C3.- J3.1 OK3.3 U$14.1
GND3: C4.- J4.1 OK4.3 U$19.1
GND4: C5.- J5.1 OK5.3 U$24.1
GND5: C6.- J6.1 OK6.3 U$29.1
GND6: C7.- J7.1 OK7.3 U$34.1
GND7: C8.- J8.1 OK8.3 U$39.1
GND8: C9.- J9.1 OK9.3 U$44.1
GND9: C10.- J10.1 OK10.3 U$49.1
GND10: C11.- J11.1 OK11.3 U$54.1
GND11: C12.- J12.1 OK12.3 U$59.1
GND12: C13.- J13.1 OK13.3 U$64.1
GND13: C14.- J14.1 OK14.3 U$69.1
GND14: C15.- J15.1 OK15.3 U$74.1
GND15: C16.- J16.1 OK16.3 U$79.1
GND16: C17.- J17.1 OK17.3 U$84.1
GND17: C18.- J18.1 OK18.3 U$89.1
GND18: C19.- J19.1 OK19.3 U$94.1
GND19: C20.- J20.1 OK20.3 U$99.1
N$1: B1.- R2.2
N$2: C2.+ JP1.2
N$3: LED1.C R3.1
N$4: JP2.1 R3.2
N$5: B2.- R5.2
N$6: C1.+ JP3.2
N$7: JP4.1 R6.2
N$8: LED2.C R6.1
N$9: B3.- R8.2
N$10: C3.+ JP5.2
N$11: JP6.1 R9.2
N$12: LED3.C R9.1
N$13: B4.- R11.2
N$14: C4.+ JP7.2
N$15: JP8.1 R12.2
N$16: LED4.C R12.1
N$17: B5.- R14.2
N$18: C5.+ JP9.2
N$19: JP10.1 R15.2
N$20: LED5.C R15.1
N$21: B6.- R17.2
N$22: C6.+ JP11.2
N$23: JP12.1 R18.2
N$24: LED6.C R18.1
N$25: B7.- R20.2
N$26: C7.+ JP13.2
N$27: JP14.1 R21.2
N$28: LED7.C R21.1
N$29: B8.- R23.2
N$30: C8.+ JP15.2
N$31: JP16.1 R24.2
N$32: LED8.C R24.1
N$33: B9.- R26.2
N$34: C9.+ JP17.2
N$35: JP18.1 R27.2
N$36: LED9.C R27.1
N$37: B10.- R29.2
N$38: C10.+ JP19.2
N$39: JP20.1 R30.2
N$40: LED10.C R30.1
N$41: B11.- R32.2
N$42: C11.+ JP21.2
N$43: JP22.1 R33.2
N$44: LED11.C R33.1
N$45: B12.- R35.2
N$46: C12.+ JP23.2
N$47: JP24.1 R36.2
N$48: LED12.C R36.1
N$49: B13.- R38.2
N$50: C13.+ JP25.2
N$51: JP26.1 R39.2
N$52: LED13.C R39.1
N$53: B14.- R41.2
N$54: C14.+ JP27.2
N$55: JP28.1 R42.2
N$56: LED14.C R42.1
N$57: B15.- R44.2
N$58: C15.+ JP29.2
N$59: JP30.1 R45.2
N$60: LED15.C R45.1
N$61: B16.- R47.2
N$62: C16.+ JP31.2
N$63: JP32.1 R48.2
N$64: LED16.C R48.1
N$65: B17.- R50.2
N$66: C17.+ JP33.2
N$67: JP34.1 R51.2
N$68: LED17.C R51.1
N$69: B18.- R53.2
N$70: C18.+ JP35.2
N$71: JP36.1 R54.2
N$72: LED18.C R54.1
N$73: B19.- R56.2
N$74: C19.+ JP37.2
N$75: JP38.1 R57.2
N$76: LED19.C R57.1
N$77: B20.- R59.2
N$78: C20.+ JP39.2
N$79: JP40.1 R60.2
N$80: LED20.C R60.1
SIGNAL: J1.3 JP1.1 JP2.2 OK1.4 R1.1 U$8.2
SIGNAL1: J2.3 JP3.1 JP4.2 OK2.4 R4.1 U$9.2
SIGNAL2: J3.3 JP5.1 JP6.2 OK3.4 R7.1 U$14.2
SIGNAL3: J4.3 JP7.1 JP8.2 OK4.4 R10.1 U$19.2
SIGNAL4: J5.3 JP9.1 JP10.2 OK5.4 R13.1 U$24.2
SIGNAL5: J6.3 JP11.1 JP12.2 OK6.4 R16.1 U$29.2
SIGNAL6: J7.3 JP13.1 JP14.2 OK7.4 R19.1 U$34.2
SIGNAL7: J8.3 JP15.1 JP16.2 OK8.4 R22.1 U$39.2
SIGNAL8: J9.3 JP17.1 JP18.2 OK9.4 R25.1 U$44.2
SIGNAL9: J10.3 JP19.1 JP20.2 OK10.4 R28.1 U$49.2
SIGNAL10: J11.3 JP21.1 JP22.2 OK11.4 R31.1 U$54.2
SIGNAL11: J12.3 JP23.1 JP24.2 OK12.4 R34.1 U$59.2
SIGNAL12: J13.3 JP25.1 JP26.2 OK13.4 R37.1 U$64.2
SIGNAL13: J14.3 JP27.1 JP28.2 OK14.4 R40.1 U$69.2
SIGNAL14: J15.3 JP29.1 JP30.2 OK15.4 R43.1 U$74.2
SIGNAL15: J16.3 JP31.1 JP32.2 OK16.4 R46.1 U$79.2
SIGNAL16: J17.3 JP33.1 JP34.2 OK17.4 R49.1 U$84.2
SIGNAL17: J18.3 JP35.1 JP36.2 OK18.4 R52.1 U$89.2
SIGNAL18: J19.3 JP37.1 JP38.2 OK19.4 R55.1 U$94.2
SIGNAL19: J20.3 JP39.1 JP40.2 OK20.4 R58.1 U$99.2

## Tracks (layer width: path | path; a pad name or v marks a point on that pad's centre or on a via)
5V
  Top 0.254: R1.2 23.55,15.53 22.72,16.36 22.72,17.91 LED1.A
  Top 0.508: J1.2 17.24,13.75 23.31,13.75 23.55,14 R1.2
5V1
  Top 0.254: R4.2 48.55,15.53 47.72,16.36 47.72,17.91 LED2.A
  Top 0.508: J2.2 42.24,13.75 48.31,13.75 48.55,14 R4.2
5V2
  Top 0.254: R7.2 73.55,15.53 72.72,16.36 72.72,17.91 LED3.A
  Top 0.508: J3.2 67.24,13.75 73.31,13.75 73.55,14 R7.2
5V3
  Top 0.254: R10.2 98.55,15.53 97.72,16.36 97.72,17.91 LED4.A
  Top 0.508: J4.2 92.24,13.75 98.31,13.75 98.55,14 R10.2
5V4
  Top 0.254: R13.2 123.55,15.53 122.72,16.36 122.72,17.91 LED5.A
  Top 0.508: J5.2 117.24,13.75 123.31,13.75 123.55,14 R13.2
5V5
  Top 0.254: R16.2 23.55,40.53 22.72,41.36 22.72,42.91 LED6.A
  Top 0.508: J6.2 17.24,38.75 23.31,38.75 23.55,38.99 R16.2
5V6
  Top 0.254: R19.2 48.55,40.53 47.72,41.36 47.72,42.91 LED7.A
  Top 0.508: J7.2 42.24,38.75 48.31,38.75 48.55,38.99 R19.2
5V7
  Top 0.254: R22.2 73.55,40.53 72.72,41.36 72.72,42.91 LED8.A
  Top 0.508: J8.2 67.24,38.75 73.31,38.75 73.55,38.99 R22.2
5V8
  Top 0.254: R25.2 98.55,40.53 97.72,41.36 97.72,42.91 LED9.A
  Top 0.508: J9.2 92.24,38.75 98.31,38.75 98.55,38.99 R25.2
5V9
  Top 0.254: R28.2 123.55,40.53 122.72,41.36 122.72,42.91 LED10.A
  Top 0.508: J10.2 117.24,38.75 123.31,38.75 123.55,38.99 R28.2
5V10
  Top 0.254: R31.2 23.55,65.53 22.72,66.36 22.72,67.91 LED11.A
  Top 0.508: J11.2 17.24,63.75 23.31,63.75 23.55,64 R31.2
5V11
  Top 0.254: R34.2 48.55,65.53 47.72,66.36 47.72,67.91 LED12.A
  Top 0.508: J12.2 42.24,63.75 48.31,63.75 48.55,64 R34.2
5V12
  Top 0.254: R37.2 73.55,65.53 72.72,66.36 72.72,67.91 LED13.A
  Top 0.508: J13.2 67.24,63.75 73.31,63.75 73.55,64 R37.2
5V13
  Top 0.254: R40.2 98.55,65.53 97.72,66.36 97.72,67.91 LED14.A
  Top 0.508: J14.2 92.24,63.75 98.31,63.75 98.55,64 R40.2
5V14
  Top 0.254: R43.2 123.55,65.53 122.72,66.36 122.72,67.91 LED15.A
  Top 0.508: J15.2 117.24,63.75 123.31,63.75 123.55,64 R43.2
5V15
  Top 0.254: R46.2 23.55,90.53 22.72,91.36 22.72,92.91 LED16.A
  Top 0.508: J16.2 17.24,88.75 23.31,88.75 23.55,89 R46.2
5V16
  Top 0.254: R49.2 48.55,90.53 47.72,91.36 47.72,92.91 LED17.A
  Top 0.508: J17.2 42.24,88.75 48.31,88.75 48.55,89 R49.2
5V17
  Top 0.254: R52.2 73.55,90.53 72.72,91.36 72.72,92.91 LED18.A
  Top 0.508: J18.2 67.24,88.75 73.31,88.75 73.55,89 R52.2
5V18
  Top 0.254: R55.2 98.55,90.53 97.72,91.36 97.72,92.91 LED19.A
  Top 0.508: J19.2 92.24,88.75 98.31,88.75 98.55,89 R55.2
5V19
  Top 0.254: R58.2 123.55,90.53 122.72,91.36 122.72,92.91 LED20.A
  Top 0.508: J20.2 117.24,88.75 123.31,88.75 123.55,89 R58.2
+
  Top 0.508: OK1.1 13.66,2.66 12,1 4.3,1 B1.+
+1
  Top 0.508: OK2.1 38.66,2.66 37,1 29.3,1 B2.+
+2
  Top 0.508: OK3.1 63.66,2.66 62,1 54.3,1 B3.+
+3
  Top 0.508: OK4.1 88.66,2.66 87,1 79.3,1 B4.+
+4
  Top 0.508: OK5.1 113.66,2.66 112,1 104.3,1 B5.+
+5
  Top 0.508: OK6.1 13.66,27.66 12,26 4.3,26 B6.+
+6
  Top 0.508: OK7.1 38.66,27.66 37,26 29.3,26 B7.+
+7
  Top 0.508: OK8.1 63.66,27.66 62,26 54.3,26 B8.+
+8
  Top 0.508: OK9.1 88.66,27.66 87,26 79.3,26 B9.+
+9
  Top 0.508: OK10.1 113.66,27.66 112,26 104.3,26 B10.+
+10
  Top 0.508: OK11.1 13.66,52.66 12,51 4.3,51 B11.+
+11
  Top 0.508: OK12.1 38.66,52.66 37,51 29.3,51 B12.+
+12
  Top 0.508: OK13.1 63.66,52.66 62,51 54.3,51 B13.+
+13
  Top 0.508: OK14.1 88.66,52.66 87,51 79.3,51 B14.+
+14
  Top 0.508: OK15.1 113.66,52.66 112,51 104.3,51 B15.+
+15
  Top 0.508: OK16.1 13.66,77.66 12,76 4.3,76 B16.+
+16
  Top 0.508: OK17.1 38.66,77.66 37,76 29.3,76 B17.+
+17
  Top 0.508: OK18.1 63.66,77.66 62,76 54.3,76 B18.+
+18
  Top 0.508: OK19.1 88.66,77.66 87,76 79.3,76 B19.+
+19
  Top 0.508: OK20.1 113.66,77.66 112,76 104.3,76 B20.+
-
  Top 0.508: R2.1 11.23,4.23 12,5 15,5 16.2,3.8 OK1.2
-1
  Top 0.508: R5.1 36.23,4.23 37,5 40,5 41.2,3.8 OK2.2
-2
  Top 0.508: R8.1 61.23,4.23 62,5 65,5 66.2,3.8 OK3.2
-3
  Top 0.508: R11.1 86.23,4.23 87,5 90,5 91.2,3.8 OK4.2
-4
  Top 0.508: R14.1 111.23,4.23 112,5 115,5 116.2,3.8 OK5.2
-5
  Top 0.508: R17.1 11.23,29.23 12,30 15,30 16.2,28.8 OK6.2
-6
  Top 0.508: R20.1 36.23,29.23 37,30 40,30 41.2,28.8 OK7.2
-7
  Top 0.508: R23.1 61.23,29.23 62,30 65,30 66.2,28.8 OK8.2
-8
  Top 0.508: R26.1 86.23,29.23 87,30 90,30 91.2,28.8 OK9.2
-9
  Top 0.508: R29.1 111.23,29.23 112,30 115,30 116.2,28.8 OK10.2
-10
  Top 0.508: R32.1 11.23,54.23 12,55 15,55 16.2,53.8 OK11.2
-11
  Top 0.508: R35.1 36.23,54.23 37,55 40,55 41.2,53.8 OK12.2
-12
  Top 0.508: R38.1 61.23,54.23 62,55 65,55 66.2,53.8 OK13.2
-13
  Top 0.508: R41.1 86.23,54.23 87,55 90,55 91.2,53.8 OK14.2
-14
  Top 0.508: R44.1 111.23,54.23 112,55 115,55 116.2,53.8 OK15.2
-15
  Top 0.508: R47.1 11.23,79.23 12,80 15,80 16.2,78.8 OK16.2
-16
  Top 0.508: R50.1 36.23,79.23 37,80 40,80 41.2,78.8 OK17.2
-17
  Top 0.508: R53.1 61.23,79.23 62,80 65,80 66.2,78.8 OK18.2
-18
  Top 0.508: R56.1 86.23,79.23 87,80 90,80 91.2,78.8 OK19.2
-19
  Top 0.508: R59.1 111.23,79.23 112,80 115,80 116.2,78.8 OK20.2
AC_L
  Top 1.27: U$7.2 7.32,12.08 B1.AC2
AC_L1
  Top 1.27: U$10.2 32.32,12.08 B2.AC2
AC_L2
  Top 1.27: U$15.2 57.32,12.08 B3.AC2
AC_L3
  Top 1.27: U$20.2 82.32,12.08 B4.AC2
AC_L4
  Top 1.27: U$25.2 107.32,12.08 B5.AC2
AC_L5
  Top 1.27: U$30.2 7.32,37.08 B6.AC2
AC_L6
  Top 1.27: U$35.2 32.32,37.08 B7.AC2
AC_L7
  Top 1.27: U$40.2 57.32,37.08 B8.AC2
AC_L8
  Top 1.27: U$45.2 82.32,37.08 B9.AC2
AC_L9
  Top 1.27: U$50.2 107.32,37.08 B10.AC2
AC_L10
  Top 1.27: U$55.2 7.32,62.08 B11.AC2
AC_L11
  Top 1.27: U$60.2 32.32,62.08 B12.AC2
AC_L12
  Top 1.27: U$65.2 57.32,62.08 B13.AC2
AC_L13
  Top 1.27: U$70.2 82.32,62.08 B14.AC2
AC_L14
  Top 1.27: U$75.2 107.32,62.08 B15.AC2
AC_L15
  Top 1.27: U$80.2 7.32,87.08 B16.AC2
AC_L16
  Top 1.27: U$85.2 32.32,87.08 B17.AC2
AC_L17
  Top 1.27: U$90.2 57.32,87.08 B18.AC2
AC_L18
  Top 1.27: U$95.2 82.32,87.08 B19.AC2
AC_L19
  Top 1.27: U$100.2 107.32,87.08 B20.AC2
AC_N
  Top 1.27: U$7.1 2.28,19 B1.AC1
AC_N1
  Top 1.27: U$10.1 27.28,19 B2.AC1
AC_N2
  Top 1.27: U$15.1 52.28,19 B3.AC1
AC_N3
  Top 1.27: U$20.1 77.28,19 B4.AC1
AC_N4
  Top 1.27: U$25.1 102.28,19 B5.AC1
AC_N5
  Top 1.27: U$30.1 2.28,44 B6.AC1
AC_N6
  Top 1.27: U$35.1 27.28,44 B7.AC1
AC_N7
  Top 1.27: U$40.1 52.28,44 B8.AC1
AC_N8
  Top 1.27: U$45.1 77.28,44 B9.AC1
AC_N9
  Top 1.27: U$50.1 102.28,44 B10.AC1
AC_N10
  Top 1.27: U$55.1 2.28,69 B11.AC1
AC_N11
  Top 1.27: U$60.1 27.28,69 B12.AC1
AC_N12
  Top 1.27: U$65.1 52.28,69 B13.AC1
AC_N13
  Top 1.27: U$70.1 77.28,69 B14.AC1
AC_N14
  Top 1.27: U$75.1 102.28,69 B15.AC1
AC_N15
  Top 1.27: U$80.1 2.28,94 B16.AC1
AC_N16
  Top 1.27: U$85.1 27.28,94 B17.AC1
AC_N17
  Top 1.27: U$90.1 52.28,94 B18.AC1
AC_N18
  Top 1.27: U$95.1 77.28,94 B19.AC1
AC_N19
  Top 1.27: U$100.1 102.28,94 B20.AC1
GND
  Top 0.508: U$8.1 12.38,16.07 J1.1 14.47,13.98 15.56,13.98 16.2,13.35 OK1.3 16.2,10.38 17,9.58 | C2.- 19.3,9.58 17,9.58 | 17,9.58 16.96,9.58
GND1
  Top 0.508: U$9.1 37.38,16.07 J2.1 39.47,13.98 40.56,13.98 41.2,13.35 OK2.3 41.2,10.38 42,9.58 | C1.- 44.3,9.58 42,9.58 | 42,9.58 41.96,9.58
GND2
  Top 0.508: U$14.1 62.38,16.07 J3.1 64.47,13.98 65.56,13.98 66.2,13.35 OK3.3 66.2,10.38 67,9.58 | C3.- 69.3,9.58 67,9.58 | 67,9.58 66.96,9.58
GND3
  Top 0.508: U$19.1 87.39,16.07 J4.1 89.47,13.98 90.56,13.98 91.2,13.35 OK4.3 91.2,10.38 92,9.58 | C4.- 94.3,9.58 92,9.58 | 92,9.58 91.96,9.58
GND4
  Top 0.508: U$24.1 112.39,16.07 J5.1 114.47,13.98 115.56,13.98 116.2,13.35 OK5.3 116.2,10.38 117,9.58 | C5.- 119.3,9.58 117,9.58 | 117,9.58 116.96,9.58
GND5
  Top 0.508: U$29.1 12.38,41.07 J6.1 14.47,38.98 15.56,38.98 16.2,38.35 OK6.3 16.2,35.38 17,34.58 | C6.- 19.3,34.58 17,34.58 | 17,34.58 16.96,34.58
GND6
  Top 0.508: U$34.1 37.38,41.07 J7.1 39.47,38.98 40.56,38.98 41.2,38.35 OK7.3 41.2,35.38 42,34.58 | C7.- 44.3,34.58 42,34.58 | 42,34.58 41.96,34.58
GND7
  Top 0.508: U$39.1 62.38,41.07 J8.1 64.47,38.98 65.56,38.98 66.2,38.35 OK8.3 66.2,35.38 67,34.58 | C8.- 69.3,34.58 67,34.58 | 67,34.58 66.96,34.58
GND8
  Top 0.508: U$44.1 87.39,41.07 J9.1 89.47,38.98 90.56,38.98 91.2,38.35 OK9.3 91.2,35.38 92,34.58 | C9.- 94.3,34.58 92,34.58 | 92,34.58 91.96,34.58
GND9
  Top 0.508: U$49.1 112.39,41.07 J10.1 114.47,38.98 115.56,38.98 116.2,38.35 OK10.3 116.2,35.38 117,34.58 | C10.- 119.3,34.58 117,34.58 | 117,34.58 116.96,34.58
GND10
  Top 0.508: U$54.1 12.38,66.07 J11.1 14.47,63.98 15.56,63.98 16.2,63.35 OK11.3 16.2,60.38 17,59.58 | C11.- 19.3,59.58 17,59.58 | 17,59.58 16.96,59.58
GND11
  Top 0.508: U$59.1 37.38,66.07 J12.1 39.47,63.98 40.56,63.98 41.2,63.35 OK12.3 41.2,60.38 42,59.58 | C12.- 44.3,59.58 42,59.58 | 42,59.58 41.96,59.58
GND12
  Top 0.508: U$64.1 62.38,66.07 J13.1 64.47,63.98 65.56,63.98 66.2,63.35 OK13.3 66.2,60.38 67,59.58 | C13.- 69.3,59.58 67,59.58 | 67,59.58 66.96,59.58
GND13
  Top 0.508: U$69.1 87.39,66.07 J14.1 89.47,63.98 90.56,63.98 91.2,63.35 OK14.3 91.2,60.38 92,59.58 | C14.- 94.3,59.58 92,59.58 | 92,59.58 91.96,59.58
GND14
  Top 0.508: U$74.1 112.39,66.07 J15.1 114.47,63.98 115.56,63.98 116.2,63.35 OK15.3 116.2,60.38 117,59.58 | C15.- 119.3,59.58 117,59.58 | 117,59.58 116.96,59.58
GND15
  Top 0.508: U$79.1 12.38,91.07 J16.1 14.47,88.98 15.56,88.98 16.2,88.35 OK16.3 16.2,85.38 17,84.58 | C16.- 19.3,84.58 17,84.58 | 17,84.58 16.96,84.58
GND16
  Top 0.508: U$84.1 37.38,91.07 J17.1 39.47,88.98 40.56,88.98 41.2,88.35 OK17.3 41.2,85.38 42,84.58 | C17.- 44.3,84.58 42,84.58 | 42,84.58 41.96,84.58
GND17
  Top 0.508: U$89.1 62.38,91.07 J18.1 64.47,88.98 65.56,88.98 66.2,88.35 OK18.3 66.2,85.38 67,84.58 | C18.- 69.3,84.58 67,84.58 | 67,84.58 66.96,84.58
GND18
  Top 0.508: U$94.1 87.39,91.07 J19.1 89.47,88.98 90.56,88.98 91.2,88.35 OK19.3 91.2,85.38 92,84.58 | C19.- 94.3,84.58 92,84.58 | 92,84.58 91.96,84.58
GND19
  Top 0.508: U$99.1 112.39,91.07 J20.1 114.47,88.98 115.56,88.98 116.2,88.35 OK20.3 116.2,85.38 117,84.58 | C20.- 119.3,84.58 117,84.58 | 117,84.58 116.96,84.58
N$1
  Top 0.508: B1.- 7.87,2.53 R2.2
N$2  (via drill 0.55)
  Top 0.508: v20.15,11.27 21.41,11.27 C2.+
  Bottom 0.508: JP1.2 21.9,8.79 20.15,10.54 v20.15,11.27
N$3
  Top 0.508: R3.1 23.55,18.58 LED1.C
N$4  (via drill 0.55)
  Top 0.508: v20.56,17.42 21.4,17.42 R3.2
  Bottom 0.508: JP2.1 23.25,16.01 22.06,17.2 20.86,17.2 20.56,17.5 | 20.55,17.51 20.56,17.5 | 20.56,17.5 v20.56,17.42
N$5
  Top 0.508: B2.- 32.87,2.53 R5.2
N$6  (via drill 0.55)
  Top 0.508: v45.15,11.27 46.41,11.27 C1.+
  Bottom 0.508: JP3.2 46.9,8.79 45.15,10.54 v45.15,11.27
N$7  (via drill 0.55)
  Top 0.508: v45.56,17.42 46.4,17.42 R6.2
  Bottom 0.508: JP4.1 48.25,16.01 47.06,17.2 45.86,17.2 45.56,17.5 | 45.55,17.51 45.56,17.5 | 45.56,17.5 v45.56,17.42
N$8
  Top 0.508: R6.1 48.55,18.58 LED2.C
N$9
  Top 0.508: B3.- 57.87,2.53 R8.2
N$10  (via drill 0.55)
  Top 0.508: v70.15,11.27 71.41,11.27 C3.+
  Bottom 0.508: JP5.2 71.9,8.79 70.15,10.54 v70.15,11.27
N$11  (via drill 0.55)
  Top 0.508: v70.56,17.42 71.4,17.42 R9.2
  Bottom 0.508: JP6.1 73.25,16.01 72.06,17.2 70.86,17.2 70.56,17.5 | 70.55,17.51 70.56,17.5 | 70.56,17.5 v70.56,17.42
N$12
  Top 0.508: R9.1 73.55,18.58 LED3.C
N$13
  Top 0.508: B4.- 82.87,2.53 R11.2
N$14  (via drill 0.55)
  Top 0.508: v95.15,11.27 96.41,11.27 C4.+
  Bottom 0.508: JP7.2 96.9,8.79 95.15,10.54 v95.15,11.27
N$15  (via drill 0.55)
  Top 0.508: v95.56,17.42 96.4,17.42 R12.2
  Bottom 0.508: JP8.1 98.25,16.01 97.06,17.2 95.86,17.2 95.56,17.5 | 95.55,17.51 95.56,17.5 | 95.56,17.5 v95.56,17.42
N$16
  Top 0.508: R12.1 98.55,18.58 LED4.C
N$17
  Top 0.508: B5.- 107.87,2.53 R14.2
N$18  (via drill 0.55)
  Top 0.508: v120.15,11.27 121.41,11.27 C5.+
  Bottom 0.508: JP9.2 121.9,8.79 120.15,10.54 v120.15,11.27
N$19  (via drill 0.55)
  Top 0.508: v120.56,17.42 121.4,17.42 R15.2
  Bottom 0.508: JP10.1 123.25,16.01 122.06,17.2 120.86,17.2 120.56,17.5 | 120.55,17.51 120.56,17.5 | 120.56,17.5 v120.56,17.42
N$20
  Top 0.508: R15.1 123.55,18.58 LED5.C
N$21
  Top 0.508: B6.- 7.87,27.53 R17.2
N$22  (via drill 0.55)
  Top 0.508: v20.15,36.27 21.41,36.27 C6.+
  Bottom 0.508: JP11.2 21.9,33.79 20.15,35.54 v20.15,36.27
N$23  (via drill 0.55)
  Top 0.508: v20.56,42.42 21.4,42.42 R18.2
  Bottom 0.508: JP12.1 23.25,41.01 22.06,42.2 20.86,42.2 20.56,42.5 | 20.55,42.51 20.56,42.5 | 20.56,42.5 v20.56,42.42
N$24
  Top 0.508: R18.1 23.55,43.58 LED6.C
N$25
  Top 0.508: B7.- 32.87,27.53 R20.2
N$26  (via drill 0.55)
  Top 0.508: v45.15,36.27 46.41,36.27 C7.+
  Bottom 0.508: JP13.2 46.9,33.79 45.15,35.54 v45.15,36.27
N$27  (via drill 0.55)
  Top 0.508: v45.56,42.42 46.4,42.42 R21.2
  Bottom 0.508: JP14.1 48.25,41.01 47.06,42.2 45.86,42.2 45.56,42.5 | 45.55,42.51 45.56,42.5 | 45.56,42.5 v45.56,42.42
N$28
  Top 0.508: R21.1 48.55,43.58 LED7.C
N$29
  Top 0.508: B8.- 57.87,27.53 R23.2
N$30  (via drill 0.55)
  Top 0.508: v70.15,36.27 71.41,36.27 C8.+
  Bottom 0.508: JP15.2 71.9,33.79 70.15,35.54 v70.15,36.27
N$31  (via drill 0.55)
  Top 0.508: v70.56,42.42 71.4,42.42 R24.2
  Bottom 0.508: JP16.1 73.25,41.01 72.06,42.2 70.86,42.2 70.56,42.5 | 70.55,42.51 70.56,42.5 | 70.56,42.5 v70.56,42.42
N$32
  Top 0.508: R24.1 73.55,43.58 LED8.C
N$33
  Top 0.508: B9.- 82.87,27.53 R26.2
N$34  (via drill 0.55)
  Top 0.508: v95.15,36.27 96.41,36.27 C9.+
  Bottom 0.508: JP17.2 96.9,33.79 95.15,35.54 v95.15,36.27
N$35  (via drill 0.55)
  Top 0.508: v95.56,42.42 96.4,42.42 R27.2
  Bottom 0.508: JP18.1 98.25,41.01 97.06,42.2 95.86,42.2 95.56,42.5 | 95.55,42.51 95.56,42.5 | 95.56,42.5 v95.56,42.42
N$36
  Top 0.508: R27.1 98.55,43.58 LED9.C
N$37
  Top 0.508: B10.- 107.87,27.53 R29.2
N$38  (via drill 0.55)
  Top 0.508: v120.15,36.27 121.41,36.27 C10.+
  Bottom 0.508: JP19.2 121.9,33.79 120.15,35.54 v120.15,36.27
N$39  (via drill 0.55)
  Top 0.508: v120.56,42.42 121.4,42.42 R30.2
  Bottom 0.508: JP20.1 123.25,41.01 122.06,42.2 120.86,42.2 120.56,42.5 | 120.55,42.51 120.56,42.5 | 120.56,42.5 v120.56,42.42
N$40
  Top 0.508: R30.1 123.55,43.58 LED10.C
N$41
  Top 0.508: B11.- 7.87,52.53 R32.2
N$42  (via drill 0.55)
  Top 0.508: v20.15,61.27 21.41,61.27 C11.+
  Bottom 0.508: JP21.2 21.9,58.79 20.15,60.54 v20.15,61.27
N$43  (via drill 0.55)
  Top 0.508: v20.56,67.42 21.4,67.42 R33.2
  Bottom 0.508: JP22.1 23.25,66.01 22.06,67.2 20.86,67.2 20.56,67.5 | 20.55,67.51 20.56,67.5 | 20.56,67.5 v20.56,67.42
N$44
  Top 0.508: R33.1 23.55,68.58 LED11.C
N$45
  Top 0.508: B12.- 32.87,52.53 R35.2
N$46  (via drill 0.55)
  Top 0.508: v45.15,61.27 46.41,61.27 C12.+
  Bottom 0.508: JP23.2 46.9,58.79 45.15,60.54 v45.15,61.27
N$47  (via drill 0.55)
  Top 0.508: v45.56,67.42 46.4,67.42 R36.2
  Bottom 0.508: JP24.1 48.25,66.01 47.06,67.2 45.86,67.2 45.56,67.5 | 45.55,67.51 45.56,67.5 | 45.56,67.5 v45.56,67.42
N$48
  Top 0.508: R36.1 48.55,68.58 LED12.C
N$49
  Top 0.508: B13.- 57.87,52.53 R38.2
N$50  (via drill 0.55)
  Top 0.508: v70.15,61.27 71.41,61.27 C13.+
  Bottom 0.508: JP25.2 71.9,58.79 70.15,60.54 v70.15,61.27
N$51  (via drill 0.55)
  Top 0.508: v70.56,67.42 71.4,67.42 R39.2
  Bottom 0.508: JP26.1 73.25,66.01 72.06,67.2 70.86,67.2 70.56,67.5 | 70.55,67.51 70.56,67.5 | 70.56,67.5 v70.56,67.42
N$52
  Top 0.508: R39.1 73.55,68.58 LED13.C
N$53
  Top 0.508: B14.- 82.87,52.53 R41.2
N$54  (via drill 0.55)
  Top 0.508: v95.15,61.27 96.41,61.27 C14.+
  Bottom 0.508: JP27.2 96.9,58.79 95.15,60.54 v95.15,61.27
N$55  (via drill 0.55)
  Top 0.508: v95.56,67.42 96.4,67.42 R42.2
  Bottom 0.508: JP28.1 98.25,66.01 97.06,67.2 95.86,67.2 95.56,67.5 | 95.55,67.51 95.56,67.5 | 95.56,67.5 v95.56,67.42
N$56
  Top 0.508: R42.1 98.55,68.58 LED14.C
N$57
  Top 0.508: B15.- 107.87,52.53 R44.2
N$58  (via drill 0.55)
  Top 0.508: v120.15,61.27 121.41,61.27 C15.+
  Bottom 0.508: JP29.2 121.9,58.79 120.15,60.54 v120.15,61.27
N$59  (via drill 0.55)
  Top 0.508: v120.56,67.42 121.4,67.42 R45.2
  Bottom 0.508: JP30.1 123.25,66.01 122.06,67.2 120.86,67.2 120.56,67.5 | 120.55,67.51 120.56,67.5 | 120.56,67.5 v120.56,67.42
N$60
  Top 0.508: R45.1 123.55,68.58 LED15.C
N$61
  Top 0.508: B16.- 7.87,77.53 R47.2
N$62  (via drill 0.55)
  Top 0.508: v20.15,86.27 21.41,86.27 C16.+
  Bottom 0.508: JP31.2 21.9,83.79 20.15,85.54 v20.15,86.27
N$63  (via drill 0.55)
  Top 0.508: v20.56,92.42 21.4,92.42 R48.2
  Bottom 0.508: JP32.1 23.25,91.01 22.06,92.2 20.86,92.2 20.56,92.5 | 20.55,92.51 20.56,92.5 | 20.56,92.5 v20.56,92.42
N$64
  Top 0.508: R48.1 23.55,93.58 LED16.C
N$65
  Top 0.508: B17.- 32.87,77.53 R50.2
N$66  (via drill 0.55)
  Top 0.508: v45.15,86.27 46.41,86.27 C17.+
  Bottom 0.508: JP33.2 46.9,83.79 45.15,85.54 v45.15,86.27
N$67  (via drill 0.55)
  Top 0.508: v45.56,92.42 46.4,92.42 R51.2
  Bottom 0.508: JP34.1 48.25,91.01 47.06,92.2 45.86,92.2 45.56,92.5 | 45.55,92.51 45.56,92.5 | 45.56,92.5 v45.56,92.42
N$68
  Top 0.508: R51.1 48.55,93.58 LED17.C
N$69
  Top 0.508: B18.- 57.87,77.53 R53.2
N$70  (via drill 0.55)
  Top 0.508: v70.15,86.27 71.41,86.27 C18.+
  Bottom 0.508: JP35.2 71.9,83.79 70.15,85.54 v70.15,86.27
N$71  (via drill 0.55)
  Top 0.508: v70.56,92.42 71.4,92.42 R54.2
  Bottom 0.508: JP36.1 73.25,91.01 72.06,92.2 70.86,92.2 70.56,92.5 | 70.55,92.51 70.56,92.5 | 70.56,92.5 v70.56,92.42
N$72
  Top 0.508: R54.1 73.55,93.58 LED18.C
N$73
  Top 0.508: B19.- 82.87,77.53 R56.2
N$74  (via drill 0.55)
  Top 0.508: v95.15,86.27 96.41,86.27 C19.+
  Bottom 0.508: JP37.2 96.9,83.79 95.15,85.54 v95.15,86.27
N$75  (via drill 0.55)
  Top 0.508: v95.56,92.42 96.4,92.42 R57.2
  Bottom 0.508: JP38.1 98.25,91.01 97.06,92.2 95.86,92.2 95.56,92.5 | 95.55,92.51 95.56,92.5 | 95.56,92.5 v95.56,92.42
N$76
  Top 0.508: R57.1 98.55,93.58 LED19.C
N$77
  Top 0.508: B20.- 107.87,77.53 R59.2
N$78  (via drill 0.55)
  Top 0.508: v120.15,86.27 121.41,86.27 C20.+
  Bottom 0.508: JP39.2 121.9,83.79 120.15,85.54 v120.15,86.27
N$79  (via drill 0.55)
  Top 0.508: v120.56,92.42 121.4,92.42 R60.2
  Bottom 0.508: JP40.1 123.25,91.01 122.06,92.2 120.86,92.2 120.56,92.5 | 120.55,92.51 120.56,92.5 | 120.56,92.5 v120.56,92.42
N$80
  Top 0.508: R60.1 123.55,93.58 LED20.C
SIGNAL  (via drill 0.55)
  Top 0.508: U$8.2 17.58,18.86 J1.3 18.54,15 R1.1 | OK1.4 12.46,12.27 12.13,12.6 12.13,12.9 v12.02,13.01
  Bottom 0.508: v12.02,13.01 15.33,13.01 17.47,15.15 17.47,15.84 J1.3 20.74,12.79 JP2.2 JP1.1
SIGNAL1  (via drill 0.55)
  Top 0.508: U$9.2 42.58,18.86 J2.3 43.54,15 R4.1 | OK2.4 37.47,12.27 37.13,12.6 37.13,12.9 v37.02,13.01
  Bottom 0.508: v37.02,13.01 40.33,13.01 42.47,15.15 42.47,15.84 J2.3 45.74,12.79 JP4.2 JP3.1
SIGNAL2  (via drill 0.55)
  Top 0.508: U$14.2 67.58,18.86 J3.3 68.54,15 R7.1 | OK3.4 62.47,12.27 62.13,12.6 62.13,12.9 v62.02,13.01
  Bottom 0.508: v62.02,13.01 65.33,13.01 67.47,15.15 67.47,15.84 J3.3 70.74,12.79 JP6.2 JP5.1
SIGNAL3  (via drill 0.55)
  Top 0.508: U$19.2 92.58,18.86 J4.3 93.54,15 R10.1 | OK4.4 87.47,12.27 87.13,12.6 87.13,12.9 v87.02,13.01
  Bottom 0.508: v87.02,13.01 90.33,13.01 92.47,15.15 92.47,15.84 J4.3 95.74,12.79 JP8.2 JP7.1
SIGNAL4  (via drill 0.55)
  Top 0.508: U$24.2 117.58,18.86 J5.3 118.54,15 R13.1 | OK5.4 112.47,12.27 112.13,12.6 112.13,12.9 v112.02,13.01
  Bottom 0.508: v112.02,13.01 115.33,13.01 117.47,15.15 117.47,15.84 J5.3 120.74,12.79 JP10.2 JP9.1
SIGNAL5  (via drill 0.55)
  Top 0.508: U$29.2 17.58,43.85 J6.3 18.54,40 R16.1 | OK6.4 12.46,37.27 12.13,37.6 12.13,37.9 v12.02,38.01
  Bottom 0.508: v12.02,38.01 15.33,38.01 17.47,40.15 17.47,40.84 J6.3 20.74,37.79 JP12.2 JP11.1
SIGNAL6  (via drill 0.55)
  Top 0.508: U$34.2 42.58,43.85 J7.3 43.54,40 R19.1 | OK7.4 37.47,37.27 37.13,37.6 37.13,37.9 v37.02,38.01
  Bottom 0.508: v37.02,38.01 40.33,38.01 42.47,40.15 42.47,40.84 J7.3 45.74,37.79 JP14.2 JP13.1
SIGNAL7  (via drill 0.55)
  Top 0.508: U$39.2 67.58,43.85 J8.3 68.54,40 R22.1 | OK8.4 62.47,37.27 62.13,37.6 62.13,37.9 v62.02,38.01
  Bottom 0.508: v62.02,38.01 65.33,38.01 67.47,40.15 67.47,40.84 J8.3 70.74,37.79 JP16.2 JP15.1
SIGNAL8  (via drill 0.55)
  Top 0.508: U$44.2 92.58,43.85 J9.3 93.54,40 R25.1 | OK9.4 87.47,37.27 87.13,37.6 87.13,37.9 v87.02,38.01
  Bottom 0.508: v87.02,38.01 90.33,38.01 92.47,40.15 92.47,40.84 J9.3 95.74,37.79 JP18.2 JP17.1
SIGNAL9  (via drill 0.55)
  Top 0.508: U$49.2 117.58,43.85 J10.3 118.54,40 R28.1 | OK10.4 112.47,37.27 112.13,37.6 112.13,37.9 v112.02,38.01
  Bottom 0.508: v112.02,38.01 115.33,38.01 117.47,40.15 117.47,40.84 J10.3 120.74,37.79 JP20.2 JP19.1
SIGNAL10  (via drill 0.55)
  Top 0.508: U$54.2 17.58,68.86 J11.3 18.54,65 R31.1 | OK11.4 12.46,62.27 12.13,62.6 12.13,62.9 v12.02,63.01
  Bottom 0.508: v12.02,63.01 15.33,63.01 17.47,65.15 17.47,65.84 J11.3 20.74,62.79 JP22.2 JP21.1
SIGNAL11  (via drill 0.55)
  Top 0.508: U$59.2 42.58,68.86 J12.3 43.54,65 R34.1 | OK12.4 37.47,62.27 37.13,62.6 37.13,62.9 v37.02,63.01
  Bottom 0.508: v37.02,63.01 40.33,63.01 42.47,65.15 42.47,65.84 J12.3 45.74,62.79 JP24.2 JP23.1
SIGNAL12  (via drill 0.55)
  Top 0.508: U$64.2 67.58,68.86 J13.3 68.54,65 R37.1 | OK13.4 62.47,62.27 62.13,62.6 62.13,62.9 v62.02,63.01
  Bottom 0.508: v62.02,63.01 65.33,63.01 67.47,65.15 67.47,65.84 J13.3 70.74,62.79 JP26.2 JP25.1
SIGNAL13  (via drill 0.55)
  Top 0.508: U$69.2 92.58,68.86 J14.3 93.54,65 R40.1 | OK14.4 87.47,62.27 87.13,62.6 87.13,62.9 v87.02,63.01
  Bottom 0.508: v87.02,63.01 90.33,63.01 92.47,65.15 92.47,65.84 J14.3 95.74,62.79 JP28.2 JP27.1
SIGNAL14  (via drill 0.55)
  Top 0.508: U$74.2 117.58,68.86 J15.3 118.54,65 R43.1 | OK15.4 112.47,62.27 112.13,62.6 112.13,62.9 v112.02,63.01
  Bottom 0.508: v112.02,63.01 115.33,63.01 117.47,65.15 117.47,65.84 J15.3 120.74,62.79 JP30.2 JP29.1
SIGNAL15  (via drill 0.55)
  Top 0.508: U$79.2 17.58,93.86 J16.3 18.54,90 R46.1 | OK16.4 12.46,87.27 12.13,87.6 12.13,87.9 v12.02,88.01
  Bottom 0.508: v12.02,88.01 15.33,88.01 17.47,90.15 17.47,90.84 J16.3 20.74,87.79 JP32.2 JP31.1
SIGNAL16  (via drill 0.55)
  Top 0.508: U$84.2 42.58,93.86 J17.3 43.54,90 R49.1 | OK17.4 37.47,87.27 37.13,87.6 37.13,87.9 v37.02,88.01
  Bottom 0.508: v37.02,88.01 40.33,88.01 42.47,90.15 42.47,90.84 J17.3 45.74,87.79 JP34.2 JP33.1
SIGNAL17  (via drill 0.55)
  Top 0.508: U$89.2 67.58,93.86 J18.3 68.54,90 R52.1 | OK18.4 62.47,87.27 62.13,87.6 62.13,87.9 v62.02,88.01
  Bottom 0.508: v62.02,88.01 65.33,88.01 67.47,90.15 67.47,90.84 J18.3 70.74,87.79 JP36.2 JP35.1
SIGNAL18  (via drill 0.55)
  Top 0.508: U$94.2 92.58,93.86 J19.3 93.54,90 R55.1 | OK19.4 87.47,87.27 87.13,87.6 87.13,87.9 v87.02,88.01
  Bottom 0.508: v87.02,88.01 90.33,88.01 92.47,90.15 92.47,90.84 J19.3 95.74,87.79 JP38.2 JP37.1
SIGNAL19  (via drill 0.55)
  Top 0.508: U$99.2 117.58,93.86 J20.3 118.54,90 R58.1 | OK20.4 112.47,87.27 112.13,87.6 112.13,87.9 v112.02,88.01
  Bottom 0.508: v112.02,88.01 115.33,88.01 117.47,90.15 117.47,90.84 J20.3 120.74,87.79 JP40.2 JP39.1